# Altium PCB PCB1_1.pcbdoc (part 1 of 2)
Units mil, origin at the board's own origin, x right, y up, seen from the top; angles counter-clockwise.
Board outline 2868.46 x 4078.48 mil, 4 copper layers (Top Layer, Inner1, Inner2, Bottom Layer); 93 components, 179 nets, 649 pads, 461 vias.
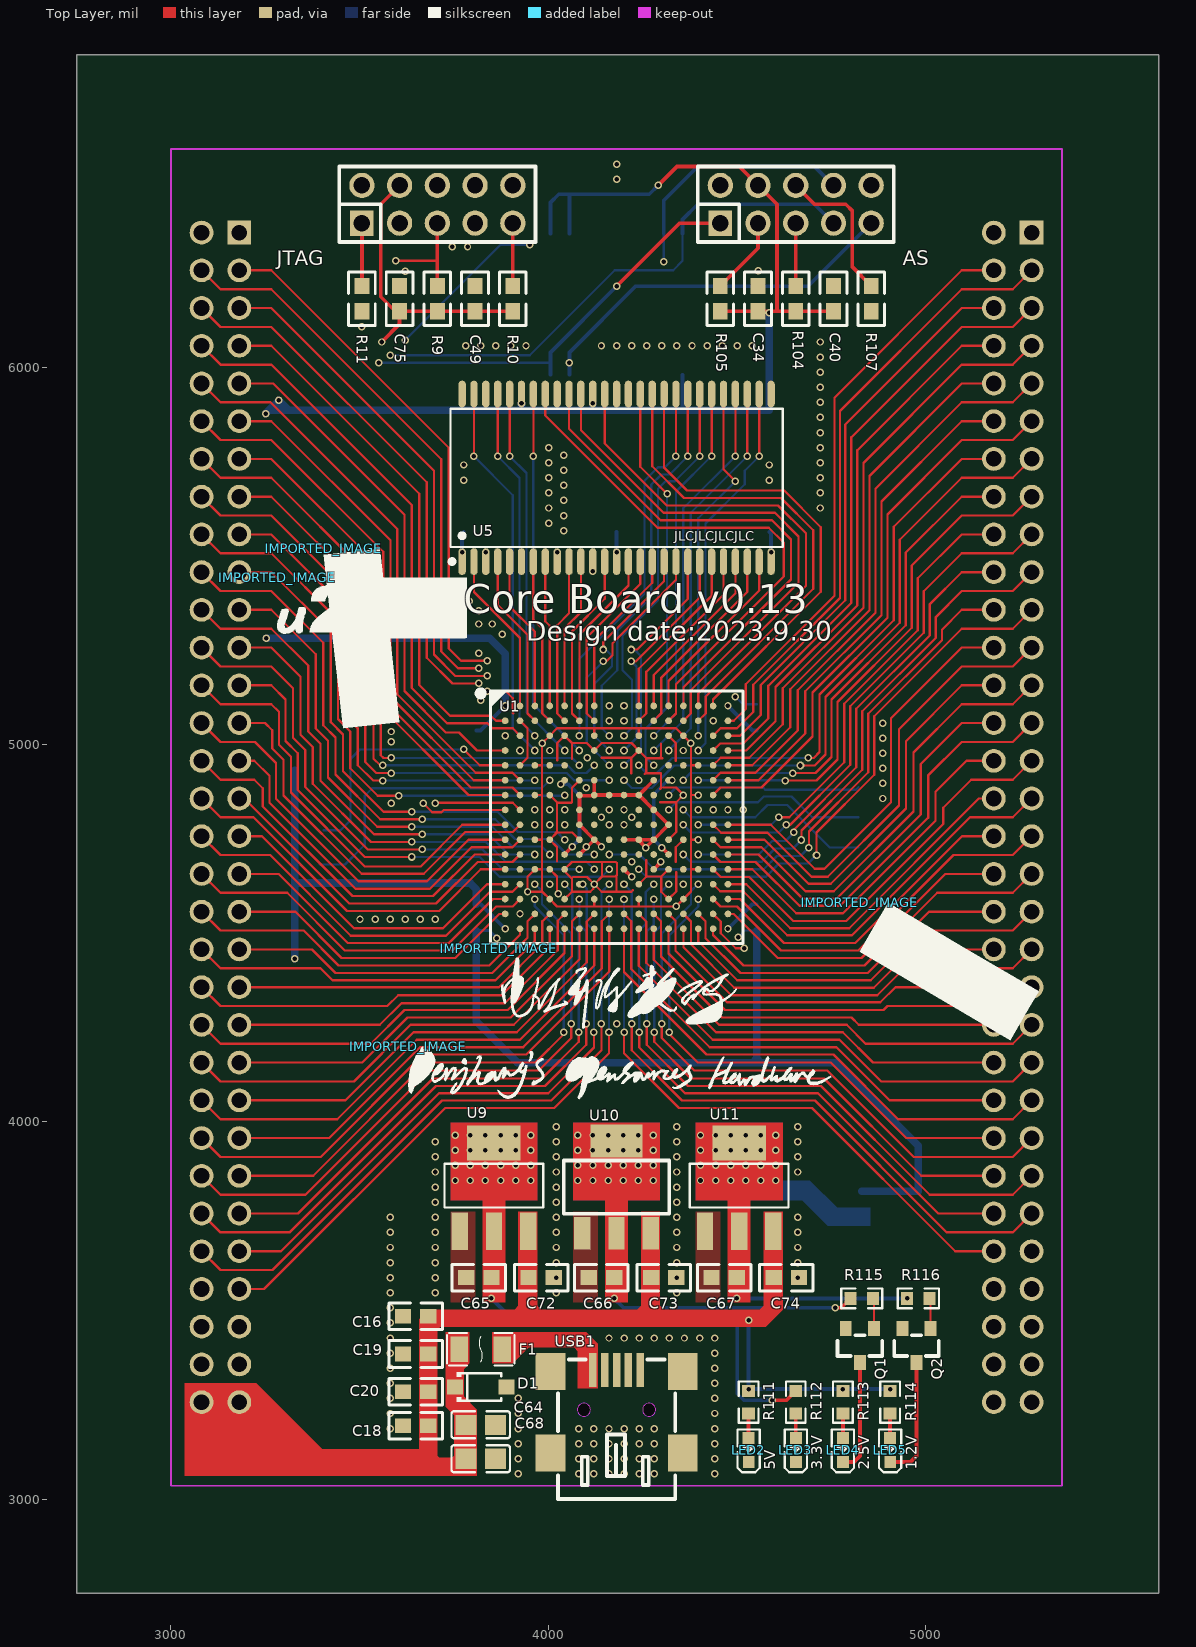
[diagram p0: Top Layer view]
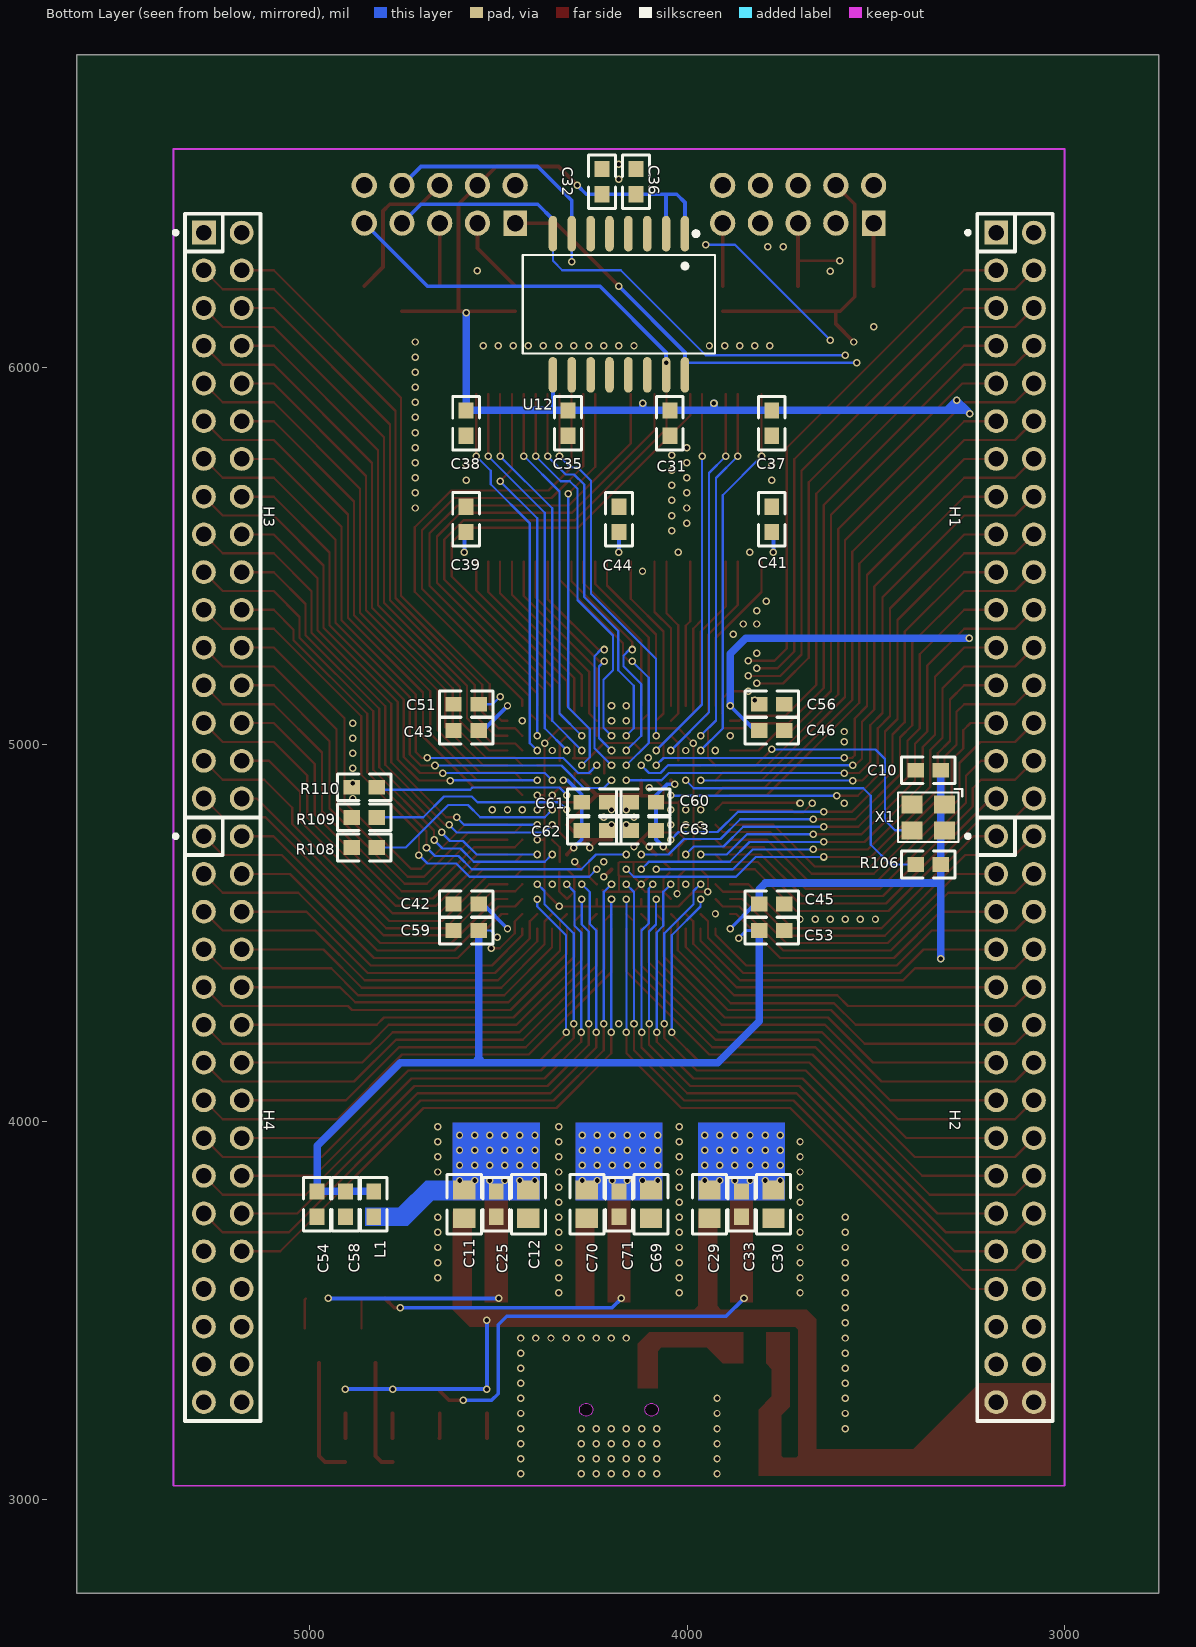
[diagram p1: Bottom Layer view, seen from below]
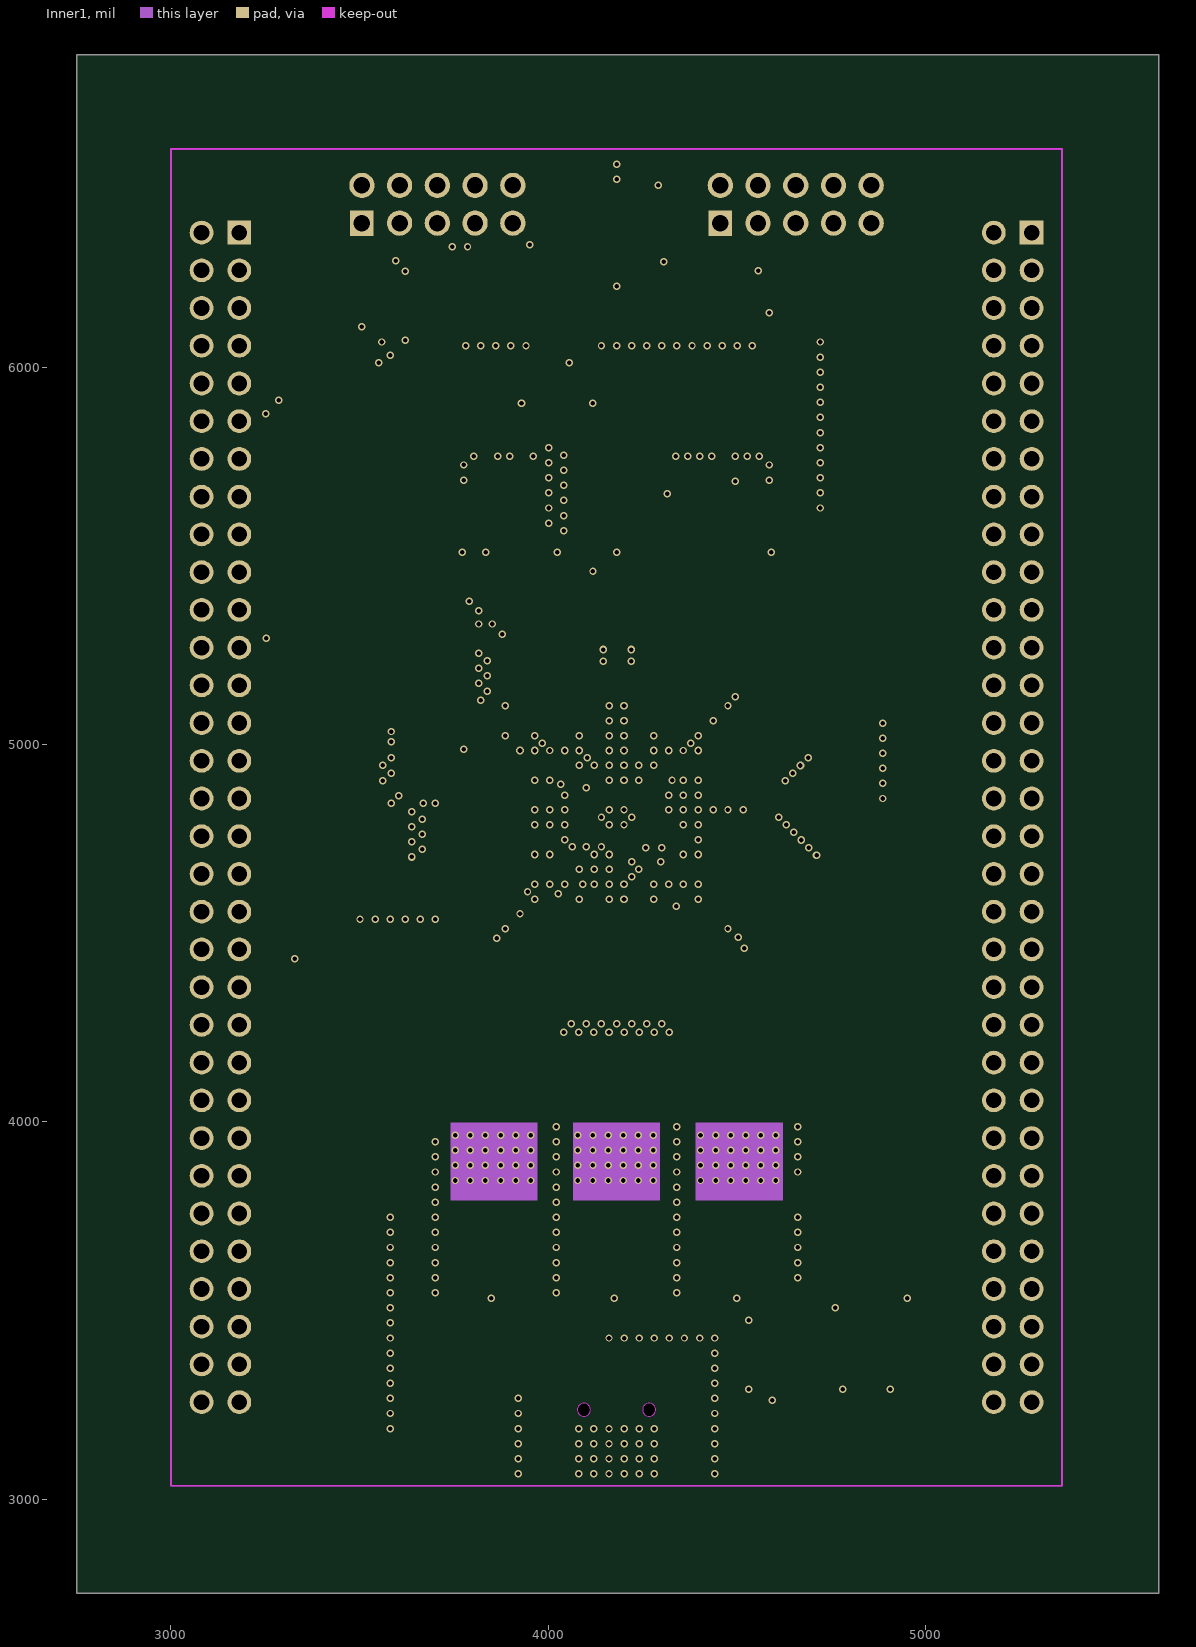
[diagram p2: Inner1]
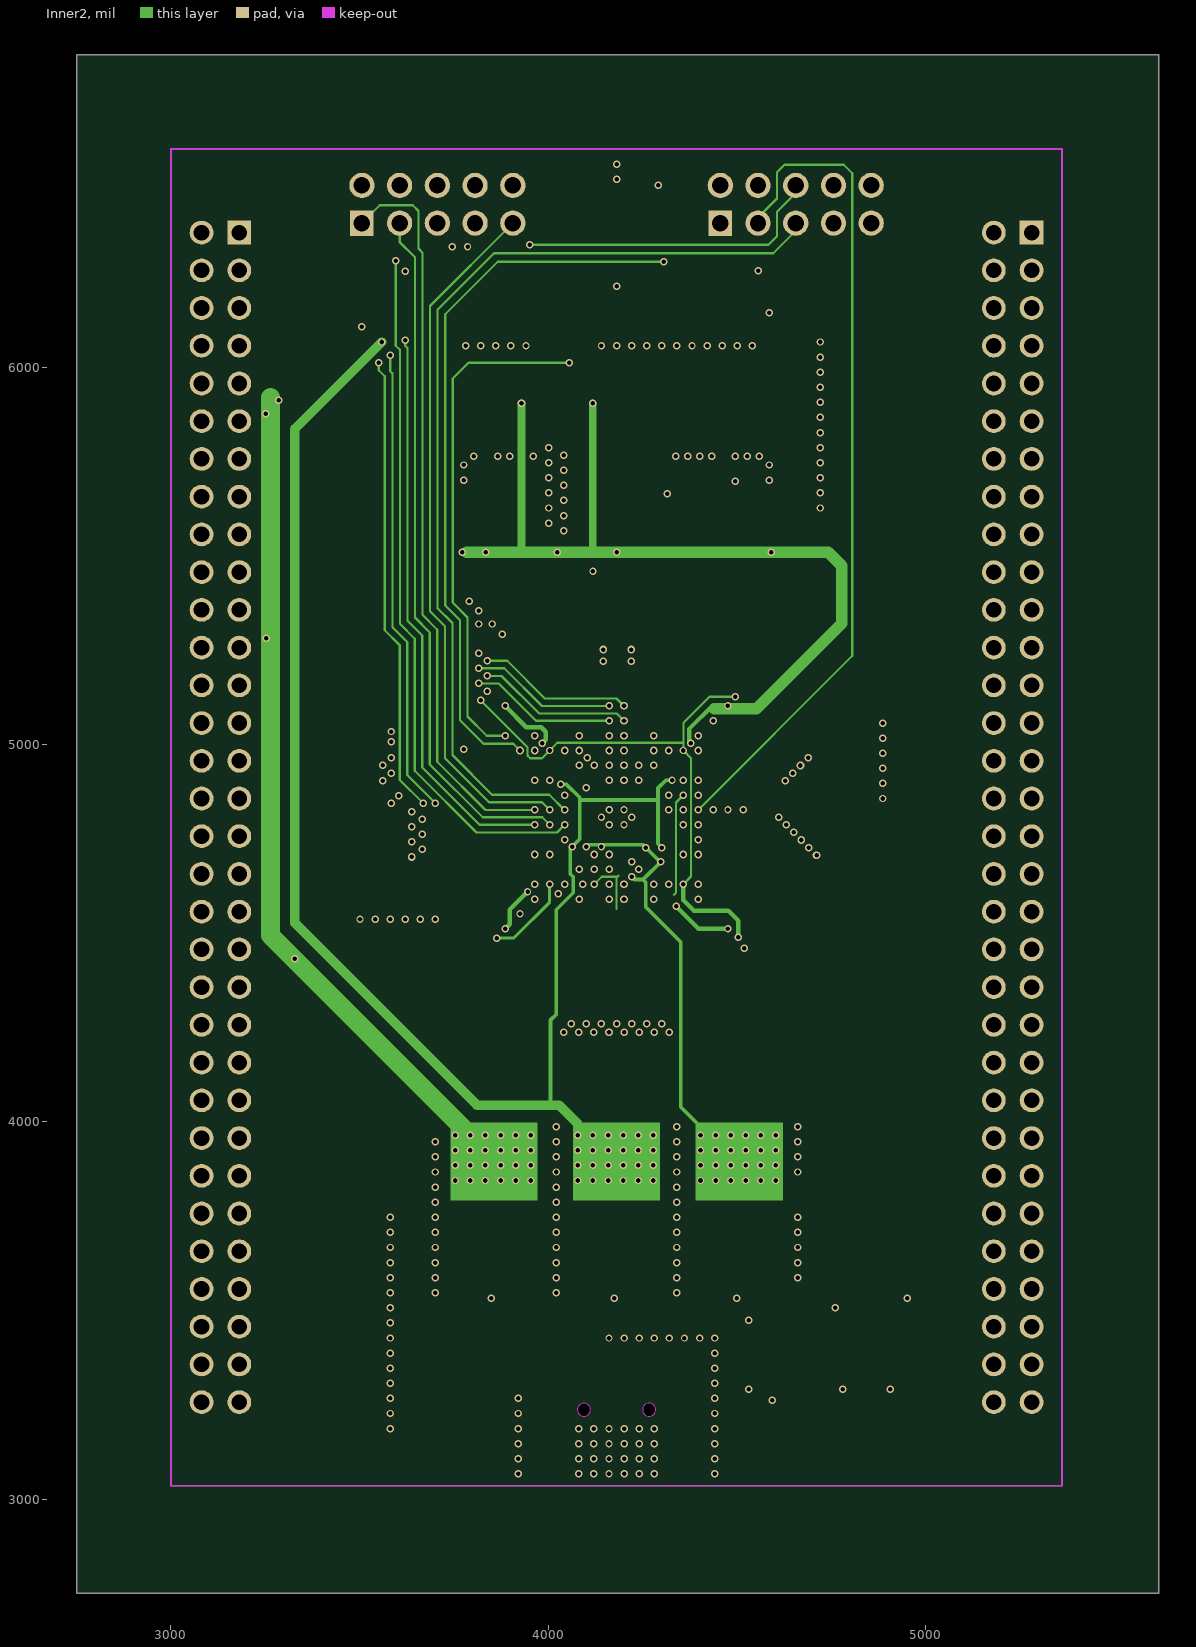
[diagram p3: Inner2]

## Layer stack, top to bottom
Top Layer: signal copper (thickness not stored)
Dielectric: dielectric 12.6, FR-4, Dk 4.8
Inner1: signal copper (thickness not stored)
Dielectric: dielectric 12.6, FR-4, Dk 4.8
Inner2: signal copper (thickness not stored)
Dielectric: dielectric 12.6, FR-4, Dk 4.8
Bottom Layer: signal copper (thickness not stored)

## Board outline
5618.46,2750 2750,2750 2750,6828.48 5618.46,6828.48

## Components (designator, comment, footprint, x,y, rotation, side; value= is the part's Value field where it differs from the comment)
AS "HDR-F_2.54_2x5" HDR-TH_10P-P2.54-V-F-R2-C5-S2.54 4656.1,6431.83 r0 top
C10 "100nF" 0603_3D 3361.1,4931.83 r0 bottom
C11 "47uF" 0805_3D 4591.1,3781.83 r90 bottom
C12 "47uF" 0805_3D 4421.1,3781.83 r90 bottom
C16 "4.7nF" 0603_3D 3648.6,3484.33 r0 top
C18 "10nF" 0603_3D 3648.6,3194.33 r0 top
C19 "470nF" 0603_3D 3648.6,3384.33 r0 top
C20 "470nF" 0603_3D 3648.6,3284.33 r0 top
C25 "100nF" 0603_3D 4506.1,3781.83 r90 bottom
C29 "47uF" 0805_3D 3941.1,3781.83 r90 bottom
C30 "47uF" 0805_3D 3771.1,3781.83 r90 bottom
C31 "100nF" 0603_3D 4046.1,5851.83 r90 bottom
C32 "100nF" 0603_3D 4226.1,6491.83 r270 bottom
C33 "100nF" 0603_3D 3856.1,3781.83 r90 bottom
C34 "100nF" 0603_3D 4556.1,6181.83 r270 top
C35 "100nF" 0603_3D 4316.1,5851.83 r90 bottom
C36 "100nF" 0603_3D 4136.1,6491.83 r270 bottom
C37 "100nF" 0603_3D 3776.1,5851.83 r90 bottom
C38 "100nF" 0603_3D 4586.1,5851.83 r90 bottom
C39 "10nF" 0603_3D 4586.1,5596.83 r270 bottom
C40 "10nF" 0603_3D 4756.1,6181.83 r270 top
C41 "10nF" 0603_3D 3776.1,5596.83 r270 bottom
C42 "10nF" 0603_3D 4586.1,4576.83 r180 bottom
C43 "10nF" 0603_3D 4586.1,5036.83 r180 bottom
C44 "10nF" 0603_3D 4181.1,5596.83 r270 bottom
C45 "10nF" 0603_3D 3776.1,4576.83 r0 bottom
C46 "10nF" 0603_3D 3776.1,5036.83 r0 bottom
C49 "100nF" 0603_3D 3806.1,6181.83 r270 top
C51 "10uF" 0603_3D 4586.1,5106.83 r180 bottom
C53 "100nF" 0603_3D 3776.1,4506.83 r0 bottom
C54 "100nF" 0603_3D 4981.1,3781.83 r90 bottom
C56 "10nF" 0603_3D 3776.1,5106.83 r0 bottom
C58 "10nF" 0603_3D 4906.1,3781.83 r90 bottom
C59 "10nF" 0603_3D 4586.1,4506.83 r180 bottom
C60 "10nF" 0603_3D 4116.1,4846.83 r180 bottom
C61 "10nF" 0603_3D 4246.1,4846.83 r0 bottom
C62 "10nF" 0603_3D 4246.1,4771.83 r0 bottom
C63 "10nF" 0603_3D 4116.1,4771.83 r180 bottom
C64 "CAP_0805" C0805 3821.1,3196.83 r180 top
C65 "CAP_0603" 0603_3D 3816.1,3586.83 r0 top
C66 "CAP_0603" 0603_3D 4141.1,3586.83 r0 top
C67 "CAP_0603" 0603_3D 4466.1,3586.83 r0 top
C68 "CAP_0805" C0805 3821.1,3106.83 r180 top
C69 "47uF" 0805_3D 4096.1,3781.83 r90 bottom
C70 "47uF" 0805_3D 4266.1,3781.83 r90 bottom
C71 "100nF" 0603_3D 4181.1,3781.83 r90 bottom
C72 "100nF" 0603_3D 3981.1,3586.83 r180 top
C73 "100nF" 0603_3D 4306.1,3586.83 r180 top
C74 "100nF" 0603_3D 4631.1,3586.83 r180 top
C75 "100nF" 0603_3D 3606.1,6181.83 r270 top
D1 "1N4148W_C81598" SOD-123F_L2.7-W1.6-LS3.8-RD 3821.1,3296.83 r0 top
F1 "FUSE" F1206 3821.1,3396.83 r180 top
H1 "X6521WV-2x16H-C30D60" HDR-TH_32P-2.54-V-M-R2-C16-S2.54 3131.1,5606.83 r270 bottom
H2 "X6521WV-2x16H-C30D60" hdr-th_32p-2.54-v-m-r2-c16-s2.54 3131.1,4006.83 r270 bottom
H3 "X6521WV-2x16H-C30D60" HDR-TH_32P-2.54-V-M-R2-C16-S2.54 5231.1,5606.83 r270 bottom
H4 "X6521WV-2x16H-C30D60" hdr-th_32p-2.54-v-m-r2-c16-s2.54 5231.1,4006.83 r270 bottom
IMPORTED_IMAGE "IMPORTED_IMAGE" IMPORTED_IMAGE 3629.49,4199.23 r0 top
IMPORTED_IMAGE "IMPORTED_IMAGE" IMPORTED_IMAGE 3868.64,4458.99 r0 top
IMPORTED_IMAGE "IMPORTED_IMAGE" IMPORTED_IMAGE 3404.99,5519.38 r0 top
IMPORTED_IMAGE "IMPORTED_IMAGE" IMPORTED_IMAGE 4825.16,4580.13 r0 top
IMPORTED_IMAGE "IMPORTED_IMAGE" IMPORTED_IMAGE 3281.1,5441.83 r0 top
JTAG "JTAG" HDR-TH_10P-P2.54-V-F-R2-C5-S2.54 3706.1,6431.83 r0 top
L1 "220R@100MHz" 0603_3D 4831.1,3781.83 r90 bottom
LED2 "5V" LED_0603 4531.1,3131.83 r90 top
LED3 "3.3V" LED_0603 4656.1,3131.83 r90 top
LED4 "2.5V" LED_0603 4781.1,3131.83 r90 top
LED5 "1.2V" LED_0603 4906.1,3131.83 r90 top
Q1 "S8050_SOT_NPN" S8050_SOT-23 4831.1,3406.83 r90 top
Q2 "S8050_SOT_NPN" S8050_SOT-23 4981.1,3406.83 r90 top
R9 "10k" 0603_3D 3706.1,6181.83 r270 top
R10 "10k" 0603_3D 3906.1,6181.83 r270 top
R11 "1k" 0603_3D 3506.1,6181.83 r270 top
R104 "10k" 0603_3D 4656.1,6181.83 r270 top
R105 "10k" 0603_3D 4456.1,6181.83 r270 top
R106 "10k" 0603_3D 3361.1,4681.83 r180 bottom
R107 "10k" 0603_3D 4856.1,6181.83 r270 top
R108 "10k" 0603_3D 4856.1,4726.83 r0 bottom
R109 "10k" 0603_3D 4856.1,4806.83 r0 bottom
R110 "10k" 0603_3D 4856.1,4886.83 r0 bottom
R111 "50M-1" R0603 4531.1,3256.83 r90 top
R112 "50M-1" R0603 4656.1,3256.83 r90 top
R113 "50M-1" R0603 4781.1,3256.83 r270 top
R114 "50M-1" R0603 4906.1,3256.83 r270 top
R115 "50M-1" R0603 4831.1,3531.83 r180 top
R116 "50M-1" R0603 4981.1,3531.83 r180 top
U1 "EP4CE22F17C8N" FBGA-256_L17.0-W17.0-R16-C16-P1.00-TL 4181.1,4806.83 r0 top
U5 "W9825G6KH-6" TSOP-54_L22.2-W10.2-P0.80-LS11.8-BL 4181.1,5706.83 r0 top
U9 "AMS1117-3.3_C6186" SOT-223-3_L6.5-W3.4-P2.30-LS7.0-BR 3856.1,3826.83 r270 top
U10 "AMS1117-2.5V" SOT-223_L6.7-W3.5-P2.30-BR 4181.1,3826.83 r270 top
U11 "LD1117AG-1.2V" SOT-223-3_L6.5-W3.4-P2.30-LS7.0-BR 4506.1,3826.83 r270 top
U12 "EPCS64SI16N" SOIC-16_L12.8-W7.5-P1.27-LS10.3-BL 4181.1,6166.83 r0 bottom
USB1 "5286050A01" MINI-USB-SMD_PAI_MINUSB_5P 4181.1,3231.83 r0 top
X1 "25MHz-OSC-SMD_4P-L3.2-W2.5-BL" OSC-SMD_4P-L3.2-W2.5-BL 3361.1,4806.83 r0 bottom

## Footprints (in the part's own frame and the unit in brackets; to place one, negate y for a bottom-side part, rotate by r counter-clockwise, add the part's x,y. Pads: shape width x height; smd on the part's side, far side on the other; paste and mask are expansions set on the pad)
0603_3D [mm]
  rect 1.1x1 smd: 1(-0.85,0) 2(0.85,0)
  silkscreen extent -1.8,-0.9 1.8,0.9
0805_3D [mm]
  rect 1.3x1.5 smd: 1(-0.95,0) 2(0.95,0)
  silkscreen extent -2,-1.15 2,1.15
C0805 [mm]
  rect 1.41x1.35 smd: 1(-1,0) 2(1,0)
  silkscreen extent -1.96,-0.9 1.96,0.9
F1206 [mm]
  rect 1.19x1.728 smd: 1(-1.445,0) 2(1.445,0)
  silkscreen extent -2.27,-1.09 2.27,1.09
FBGA-256_L17.0-W17.0-R16-C16-P1.00-TL [mm]
  round 0.45 smd: A1(-7.501,7.501) A2(-6.5,7.501) A3(-5.499,7.501) A4(-4.501,7.501) A5(-3.5,7.501) A6(-2.499,7.501) A7(-1.501,7.501) A8(-0.5,7.501) A9(0.5,7.501) A10(1.501,7.501) A11(2.499,7.501) A12(3.5,7.501) A13(4.501,7.501) A14(5.499,7.501) A15(6.5,7.501) A16(7.501,7.501) B1(-7.501,6.5) B2(-6.5,6.5) B3(-5.499,6.5) B4(-4.501,6.5) B5(-3.5,6.5) B6(-2.499,6.5) B7(-1.501,6.5) B8(-0.5,6.5) B9(0.5,6.5) B10(1.501,6.5) B11(2.499,6.5) B12(3.5,6.5) B13(4.501,6.5) B14(5.499,6.5) B15(6.5,6.5) B16(7.501,6.5) C1(-7.501,5.499) C2(-6.5,5.499) C3(-5.499,5.499) C4(-4.501,5.499) C5(-3.5,5.499) C6(-2.499,5.499) C7(-1.501,5.499) C8(-0.5,5.499) C9(0.5,5.499) C10(1.501,5.499) C11(2.499,5.499) C12(3.5,5.499) C13(4.501,5.499) C14(5.499,5.499) C15(6.5,5.499) C16(7.501,5.499) D1(-7.501,4.501) D2(-6.5,4.501) D3(-5.499,4.501) D4(-4.501,4.501) D5(-3.5,4.501) D6(-2.499,4.501) D7(-1.501,4.501) D8(-0.5,4.501) D9(0.5,4.501) D10(1.501,4.501) D11(2.499,4.501) D12(3.5,4.501) D13(4.501,4.501) D14(5.499,4.501) D15(6.5,4.501) D16(7.501,4.501) E1(-7.501,3.5) E2(-6.5,3.5) E3(-5.499,3.5) E4(-4.501,3.5) E5(-3.5,3.5) E6(-2.499,3.5) E7(-1.501,3.5) E8(-0.5,3.5) E9(0.5,3.5) E10(1.501,3.5) E11(2.499,3.5) E12(3.5,3.5) E13(4.501,3.5) E14(5.499,3.5) E15(6.5,3.5) E16(7.501,3.5) F1(-7.501,2.499) F2(-6.5,2.499) F3(-5.499,2.499) F4(-4.501,2.499) F5(-3.5,2.499) F6(-2.499,2.499) F7(-1.501,2.499) F8(-0.5,2.499) F9(0.5,2.499) F10(1.501,2.499) F11(2.499,2.499) F12(3.5,2.499) F13(4.501,2.499) F14(5.499,2.499) F15(6.5,2.499) F16(7.501,2.499) G1(-7.501,1.501) G2(-6.5,1.501) G3(-5.499,1.501) G4(-4.501,1.501) G5(-3.5,1.501) G6(-2.499,1.501) G7(-1.501,1.501) G8(-0.5,1.501) G9(0.5,1.501) G10(1.501,1.501) G11(2.499,1.501) G12(3.5,1.501) G13(4.501,1.501) G14(5.499,1.501) G15(6.5,1.501) G16(7.501,1.501) H1(-7.501,0.5) H2(-6.5,0.5) H3(-5.499,0.5) H4(-4.501,0.5) H5(-3.5,0.5) H6(-2.499,0.5) H7(-1.501,0.5) H8(-0.5,0.5) H9(0.5,0.5) H10(1.501,0.5) H11(2.499,0.5) H12(3.5,0.5) H13(4.501,0.5) H14(5.499,0.5) H15(6.5,0.5) H16(7.501,0.5) J1(-7.501,-0.5) J2(-6.5,-0.5) J3(-5.499,-0.5) J4(-4.501,-0.5) J5(-3.5,-0.5) J6(-2.499,-0.5) J7(-1.501,-0.5) J8(-0.5,-0.5) J9(0.5,-0.5) J10(1.501,-0.5) J11(2.499,-0.5) J12(3.5,-0.5) J13(4.501,-0.5) J14(5.499,-0.5) J15(6.5,-0.5) J16(7.501,-0.5) K1(-7.501,-1.501) K2(-6.5,-1.501) K3(-5.499,-1.501) K4(-4.501,-1.501) K5(-3.5,-1.501) K6(-2.499,-1.501) K7(-1.501,-1.501) K8(-0.5,-1.501) K9(0.5,-1.501) K10(1.501,-1.501) K11(2.499,-1.501) K12(3.5,-1.501) K13(4.501,-1.501) K14(5.499,-1.501) K15(6.5,-1.501) K16(7.501,-1.501) L1(-7.501,-2.499) L2(-6.5,-2.499) L3(-5.499,-2.499) L4(-4.501,-2.499) L5(-3.5,-2.499) L6(-2.499,-2.499) L7(-1.501,-2.499) L8(-0.5,-2.499) L9(0.5,-2.499) L10(1.501,-2.499) L11(2.499,-2.499) L12(3.5,-2.499) L13(4.501,-2.499) L14(5.499,-2.499) L15(6.5,-2.499) L16(7.501,-2.499) M1(-7.501,-3.5) M2(-6.5,-3.5) M3(-5.499,-3.5) M4(-4.501,-3.5) M5(-3.5,-3.5) M6(-2.499,-3.5) M7(-1.501,-3.5) M8(-0.5,-3.5) M9(0.5,-3.5) M10(1.501,-3.5) M11(2.499,-3.5) M12(3.5,-3.5) M13(4.501,-3.5) M14(5.499,-3.5) M15(6.5,-3.5) M16(7.501,-3.5) N1(-7.501,-4.501) N2(-6.5,-4.501) N3(-5.499,-4.501) N4(-4.501,-4.501) N5(-3.5,-4.501) N6(-2.499,-4.501) N7(-1.501,-4.501) N8(-0.5,-4.501) N9(0.5,-4.501) N10(1.501,-4.501) N11(2.499,-4.501) N12(3.5,-4.501) N13(4.501,-4.501) N14(5.499,-4.501) N15(6.5,-4.501) N16(7.501,-4.501) P1(-7.501,-5.499) P2(-6.5,-5.499) P3(-5.499,-5.499) P4(-4.501,-5.499) P5(-3.5,-5.499) P6(-2.499,-5.499) P7(-1.501,-5.499) P8(-0.5,-5.499) P9(0.5,-5.499) P10(1.501,-5.499) P11(2.499,-5.499) P12(3.5,-5.499) P13(4.501,-5.499) P14(5.499,-5.499) P15(6.5,-5.499) P16(7.501,-5.499) R1(-7.501,-6.5) R2(-6.5,-6.5) R3(-5.499,-6.5) R4(-4.501,-6.5) R5(-3.5,-6.5) R6(-2.499,-6.5) R7(-1.501,-6.5) R8(-0.5,-6.5) R9(0.5,-6.5) R10(1.501,-6.5) R11(2.499,-6.5) R12(3.5,-6.5) R13(4.501,-6.5) R14(5.499,-6.5) R15(6.5,-6.5) R16(7.501,-6.5) T1(-7.501,-7.501) T2(-6.5,-7.501) T3(-5.499,-7.501) T4(-4.501,-7.501) T5(-3.5,-7.501) T6(-2.499,-7.501) T7(-1.501,-7.501) T8(-0.5,-7.501) T9(0.5,-7.501) T10(1.501,-7.501) T11(2.499,-7.501) T12(3.5,-7.501) T13(4.501,-7.501) T14(5.499,-7.501) T15(6.5,-7.501) T16(7.501,-7.501)
  silkscreen extent -9.35,-8.5 8.5,8.55
HDR-TH_10P-P2.54-V-F-R2-C5-S2.54 [mm]
  rect 1.575x1.7 hole 1.1: 1(-5.08,-1.27)
  round 1.7 hole 1.1: 2(-5.08,1.27) 3(-2.54,-1.27) 4(-2.54,1.27) 5(0,-1.27) 6(0,1.27) 7(2.54,-1.27) 8(2.54,1.27) 9(5.08,-1.27) 10(5.08,1.27)
  silkscreen extent -6.6,-2.54 6.6,2.54
HDR-TH_32P-2.54-V-M-R2-C16-S2.54 [mm]
  rect 1.6x1.6 hole 1.05: 1(-19.05,-1.27)
  round 1.6 hole 1.05: 2(-19.05,1.27) 3(-16.51,-1.27) 4(-16.51,1.27) 5(-13.97,-1.27) 6(-13.97,1.27) 7(-11.43,-1.27) 8(-11.43,1.27) 9(-8.89,-1.27) 10(-8.89,1.27) 11(-6.35,-1.27) 12(-6.35,1.27) 13(-3.81,-1.27) 14(-3.81,1.27) 15(-1.27,-1.27) 16(-1.27,1.27) 17(1.27,-1.27) 18(1.27,1.27) 19(3.81,-1.27) 20(3.81,1.27) 21(6.35,-1.27) 22(6.35,1.27) 23(8.89,-1.27) 24(8.89,1.27) 25(11.43,-1.27) 26(11.43,1.27) 27(13.97,-1.27) 28(13.97,1.27) 29(16.51,-1.27) 30(16.51,1.27) 31(19.05,-1.27) 32(19.05,1.27)
  silkscreen extent -20.32,-3.3 20.32,2.54
hdr-th_32p-2.54-v-m-r2-c16-s2.54 [mm]
  round 1.6 hole 1.05: 1(-19.05,-1.27) 2(-19.05,1.27) 3(-16.51,-1.27) 4(-16.51,1.27) 5(-13.97,-1.27) 6(-13.97,1.27) 7(-11.43,-1.27) 8(-11.43,1.27) 9(-8.89,-1.27) 10(-8.89,1.27) 11(-6.35,-1.27) 12(-6.35,1.27) 13(-3.81,-1.27) 14(-3.81,1.27) 15(-1.27,-1.27) 16(-1.27,1.27) 17(1.27,-1.27) 18(1.27,1.27) 19(3.81,-1.27) 20(3.81,1.27) 21(6.35,-1.27) 22(6.35,1.27) 23(8.89,-1.27) 24(8.89,1.27) 25(11.43,-1.27) 26(11.43,1.27) 27(13.97,-1.27) 28(13.97,1.27) 29(16.51,-1.27) 30(16.51,1.27) 31(19.05,-1.27) 32(19.05,1.27)
  silkscreen extent -20.32,-3.3 20.32,2.54
IMPORTED_IMAGE [mil]
  silkscreen extent 0,-139 1120,0
LED_0603 [mil]
  rect 31.5x31.5 smd: 1(-33.5,-0.4) 2(29.5,-0.2)
  silkscreen extent -61,-30 53,30
MINI-USB-SMD_PAI_MINUSB_5P [mm]
  rect 0.5x2.3 smd: 1(-1.6,2.8) 2(-0.8,2.8) 3(0,2.8) 4(0.8,2.8) 5(1.6,2.8)
  rect 2x2.5 smd: 6(-4.45,2.7) 7(4.45,2.7) 8(-4.45,-2.8) 9(4.45,-2.8)
  Multi-Layer board cut-out: 2.65,0.124 2.587,0.346 2.423,0.508 2.2,0.567 1.977,0.508 1.813,0.346 1.75,0.124 1.75,0.124 1.813,-0.097 1.977,-0.259 2.2,-0.318 2.423,-0.259 2.587,-0.097 2.65,0.124
  Multi-Layer board cut-out: -1.75,0.124 -1.813,0.346 -1.977,0.508 -2.2,0.567 -2.423,0.508 -2.587,0.346 -2.65,0.124 -2.65,0.124 -2.587,-0.097 -2.423,-0.259 -2.2,-0.318 -1.977,-0.259 -1.813,-0.097 -1.75,0.124
  Multi-Layer keep-out region: 2.65,0.124 2.587,0.346 2.423,0.508 2.2,0.567 1.977,0.508 1.813,0.346 1.75,0.124 1.75,0.124 1.813,-0.097 1.977,-0.259 2.2,-0.318 2.423,-0.259 2.587,-0.097 2.65,0.124
  Multi-Layer keep-out region: -1.75,0.124 -1.813,0.346 -1.977,0.508 -2.2,0.567 -2.423,0.508 -2.587,0.346 -2.65,0.124 -2.65,0.124 -2.587,-0.097 -2.423,-0.259 -2.2,-0.318 -1.977,-0.259 -1.813,-0.097 -1.75,0.124
  silkscreen extent -3.95,-5.89 3.95,3.51
OSC-SMD_4P-L3.2-W2.5-BL [mm]
  rect 1.4x1.2 smd: 1(-1.1,-0.875) 2(1.1,-0.875) 3(1.1,0.875) 4(-1.1,0.875)
  silkscreen extent -2.29,-1.9 2.03,1.65
R0603 [mil]
  rect 31.75x34.02 smd: 1(-29.66,0) 2(29.66,0)
  silkscreen extent -55,-26 55,26
S8050_SOT-23 [mm]
  rect 1x0.8 smd: 1(1.15,-0.823) 2(1.15,1.077) 3(-1.15,0.127)
  silkscreen extent -0.7,-1.37 0.7,1.63
SOD-123F_L2.7-W1.6-LS3.8-RD [mm]
  rect 1.1x1 smd: 1(-1.735,0) 2(1.735,0)
  silkscreen extent -1.6,-1 1.38,1
SOIC-16_L12.8-W7.5-P1.27-LS10.3-BL [mil]
  oval 22.6x94.51 smd: 1(-175,-187.02) 2(-125,-187.02) 3(-75,-187.02) 4(-25,-187.02) 5(25,-187.02) 6(75,-187.02) 7(125,-187.02) 8(175,-187.02) 9(175,187.02) 10(125,187.02) 11(75,187.02) 12(25,187.02) 13(-25,187.02) 14(-75,187.02) 15(-125,187.02) 16(-175,187.02)
  silkscreen extent -255,-193 255,131
SOT-223-3_L6.5-W3.4-P2.30-LS7.0-BR [mm]
  rect 2.5x1.1 smd: 1(2.97,-2.3) 2(2.97,0) 3(2.97,2.3)
  rect 2.34x3.6 smd: 4(-2.97,0)
  silkscreen extent -1.57,-3.33 1.37,3.33
SOT-223_L6.7-W3.5-P2.30-BR [mm]
  rect 2.2x1.1 smd: 1(3.099,-2.3) 2(3.099,0) 3(3.099,2.3)
  rect 2.2x3.5 smd: 4(-3.099,0)
  silkscreen extent -1.8,-3.55 1.8,3.55
TSOP-54_L22.2-W10.2-P0.80-LS11.8-BL [mm]
  oval 0.5x1.8 smd: 1(-10.4,-5.642) 2(-9.6,-5.642) 3(-8.8,-5.642) 4(-8,-5.642) 5(-7.2,-5.642) 6(-6.4,-5.642) 7(-5.6,-5.642) 8(-4.8,-5.642) 9(-4,-5.642) 10(-3.2,-5.642) 11(-2.4,-5.642) 12(-1.6,-5.642) 13(-0.8,-5.642) 14(0,-5.642) 15(0.8,-5.642) 16(1.6,-5.642) 17(2.4,-5.642) 18(3.2,-5.642) 19(4,-5.642) 20(4.8,-5.642) 21(5.6,-5.642) 22(6.4,-5.642) 23(7.2,-5.642) 24(8,-5.642) 25(8.8,-5.642) 26(9.6,-5.642) 27(10.4,-5.642) 28(10.4,5.642) 29(9.6,5.642) 30(8.8,5.642) 31(8,5.642) 32(7.2,5.642) 33(6.4,5.642) 34(5.6,5.642) 35(4.8,5.642) 36(4,5.642) 37(3.2,5.642) 38(2.4,5.642) 39(1.6,5.642) 40(0.8,5.642) 41(0,5.642) 42(-0.8,5.642) 43(-1.6,5.642) 44(-2.4,5.642) 45(-3.2,5.642) 46(-4,5.642) 47(-4.8,5.642) 48(-5.6,5.642) 49(-6.4,5.642) 50(-7.2,5.642) 51(-8,5.642) 52(-8.8,5.642) 53(-9.6,5.642) 54(-10.4,5.642)
  silkscreen extent -11.23,-5.79 11.19,4.65

## Via types
v1: diameter 19.7, hole 12, Top Layer to Bottom Layer, 304 vias
v2: diameter 20, hole 12, Top Layer to Bottom Layer, 157 vias

## Nets (pads, with @x,y where several pads share a name; then routed paths per layer and width w, separated by ;. In a path a pad name is that pad's centre, name@x,y a point inside that pad or via, vN(x,y) a via of type N, cw(c..) or ccw(c..) an arc to the next point about the centre after c; other vN are vias at no path point)
5V: C16.2 C18.2 C19.2 C20.2 C64.2 C68.2 C72.2 C73.2 C74.2 D1.1 F1.2 H2.31 H2.32 R111.2 R113.1 R114.1 U9.3 U10.3 U11.3 | length 557.8
  Bottom Layer w10: v2(4531.1,3474.33) v2(4531.1,3291.49) v2(4781.1,3291.49) v2(4906.1,3291.49)
$1N37139: F1.1 USB1.1
$1N41626: R106.1 U1.F4 | length 778
  Bottom Layer w6: R106.1@3394.57,4681.83 3461.1,4681.83 3513.6,4734.33 3513.6,4864.33 3533.6,4884.33 3983,4884.33 v2(4003.9,4905.23)
$1N43489: R108.1 U1.H13 | length 532.6
  Bottom Layer w6: v2(4358.3,4826.53) 4378,4806.83 4548.6,4806.83 4581.1,4839.33 4633.6,4839.33 4746.1,4726.83 R108.1@4822.64,4726.83
$1N43533: R109.1 U1.H12 | length 541.1
  Bottom Layer w6: v2(4318.9,4826.53) 4339.2,4846.83 4556.1,4846.83 4571.1,4861.83 4644.73,4861.83 4699.73,4806.83 R109.1@4822.64,4806.83
$1N43577: R110.1 U1.G12 | length 517.4
  Bottom Layer w6: v2(4318.9,4865.93) 4338.8,4885.83 4569.1,4885.83 4575.1,4879.83 4815.64,4879.83 R110.1@4822.64,4886.83
$1N43963: LED2.2 R111.1 | length 65.9
  Top Layer w10: R111.1@4531.1,3227.17 4531.1,3161.53 LED2.2@4531.3,3161.33
$1N43965: LED3.2 R112.1 | length 65.9
  Top Layer w10: R112.1@4656.1,3227.17 4656.1,3161.53 LED3.2@4656.3,3161.33
$1N44437: Q1.1 R115.1 | length 80.9
  Top Layer w6: R115.1@4860.76,3531.83 4863.5,3529.09 Q1.1@4863.5,3452.11
$1N44441: Q2.1 R116.1 | length 80.9
  Top Layer w6: R116.1@5010.76,3531.83 5013.5,3529.09 Q2.1@5013.5,3452.11
$1N44679: LED5.2 R114.2 | length 65.9
  Top Layer w10: R114.2@4906.1,3227.17 4906.1,3161.53 LED5.2@4906.3,3161.33
$1N44681: LED4.2 R113.2 | length 65.9
  Top Layer w10: R113.2@4781.1,3227.17 4781.3,3226.97 LED4.2@4781.3,3161.33
$1N44686: LED4.1 Q1.3 | length 298.4
  Top Layer w10: LED4.1@4781.5,3098.33 4810.1,3098.33 4826.1,3114.33 Q1.3@4826.1,3361.55
$1N44690: LED5.1 Q2.3 | length 323.4
  Top Layer w10: LED5.1@4906.5,3098.33 4960.1,3098.33 4976.1,3114.33 Q2.3@4976.1,3361.55
ASDI: AS.9 U1.C1 U12.15 | length 2360.8
  Inner2 w6: v2(3885.8,5023.33) 3837.1,5023.33 3786.1,5074.33 3786.1,5336.83 3746.8,5376.13 3746.8,5970.03 3788.6,6011.83 v2(4056.1,6011.83)
  Bottom Layer w10: U12.15@4056.1,5979.81 v2(4056.1,6011.83) 4056.1,6039.33 4231.1,6214.33 4688.6,6214.33 AS.9@4856.1,6381.83
AUD_I2S: H3.9 U1.F15 | length 1534.5
  Top Layer w6: U1.F15@4437,4905.23 4456.6,4924.83 4549.12,4924.83 4661.5,5037.21 4661.5,5143.74 4867.13,5349.38 4867.13,5677.86 5096.1,5906.83 5231.1,5906.83 H3.9@5281.1,5956.83
AUD_SCK: H3.17 U1.J13 | length 1413.7
  Top Layer w6: v2(4631.1,4786.83) 4641.1,4786.83 4800.6,4946.33 4800.6,5101.33 4995.65,5296.38 4995.65,5406.38 5096.1,5506.83 5231.1,5506.83 H3.17@5281.1,5556.83
  Bottom Layer w6: v2(4358.3,4787.13) 4378.6,4766.83 4611.1,4766.83 v2(4631.1,4786.83)
AUD_WS: H3.11 U1.G15 | length 1483.1
  Top Layer w6: U1.G15@4437,4865.93 4456.9,4885.83 4565.28,4885.83 4700.5,5021.06 4700.5,5137.74 4898.95,5336.19 4898.95,5609.68 5096.1,5806.83 5231.1,5806.83 H3.11@5281.1,5856.83
BTN_N_I_1: H2.18 U1.T8 | length 1417.9
  Top Layer w6: H2.18@3081.1,3956.83 3131.1,3906.83 3396.82,3906.83 3668.12,4178.13 3941.44,4178.13 4161.4,4398.09 U1.T8@4161.4,4511.53
BTN_N_I_2: H2.17 U1.R8 | length 1299.9
  Top Layer w6: H2.17@3181.1,3956.83 3419.53,3956.83 3660.13,4197.43 3933.45,4197.43 4142.1,4406.09 4142.1,4531.63 U1.R8@4161.4,4550.93
CLOCK_50_I: U1.E1 X1.3 | length 682.9
  Top Layer w6: v2(3776.1,4986.83) 3818.3,4944.63 U1.E1@3885.8,4944.63
  Bottom Layer w6: X1.3@3404.41,4772.38 3449.15,4772.38 3476.1,4799.33 3476.1,4961.83 3501.1,4986.83 v2(3776.1,4986.83)
CONF_DONE: AS.3 R105.1 U1.H14 | length 2438.3
  Top Layer w10: R105.1@4456.1,6215.29 4556.1,6315.29 AS.3@4556.1,6381.83
  Inner2 w6: v2(4397.6,4826.53) 4806.1,5235.03 4806.1,6514.33 4783.6,6536.83 4626.1,6536.83 4606.1,6516.83 4606.1,6446.83 4556.1,6396.83 AS.3@4556.1,6381.83
DAC_L_O: H3.19 U1.L13 | length 1386.3
  Top Layer w6: v2(4671.1,4746.83) 4671.1,4771.83 4832.42,4933.15 4832.42,5088.15 5027.47,5283.2 5027.47,5338.2 5096.1,5406.83 5231.1,5406.83 H3.19@5281.1,5456.83
  Bottom Layer w6: v2(4358.3,4708.43) 4377.4,4689.33 4566.1,4689.33 4601.1,4724.33 4648.6,4724.33 v2(4671.1,4746.83)
DAC_R_O: H3.13 U1.F9 | length 1668.1
  Top Layer w6: v2(4668.6,4944.33) 4706.1,4944.33 4735.19,4973.42 4735.19,5125.92 4932.01,5322.74 4932.01,5542.74 5096.1,5706.83 5231.1,5706.83 H3.13@5281.1,5756.83
  Bottom Layer w6: v2(4200.8,4905.23) 4221.2,4884.83 4274.1,4884.83 4333.6,4944.33 v2(4668.6,4944.33)
DATA: AS.7 U1.H2 U12.8 | length 2895.8
  Top Layer w6: v2(3701.1,4844.33) 3702.6,4845.83 3905.9,4845.83 U1.H2@3925.2,4826.53
  Inner2 w6: v2(3581.1,6031.83) 3581.1,5989.53 3587.1,5983.53 3587.1,5310.83 3626.1,5271.83 3626.1,4919.33 v2(3701.1,4844.33)
  Bottom Layer w6: v2(3581.1,6031.83) 3951.1,6031.83 4176.1,6256.83 4331.1,6256.83 4356.1,6281.83 U12.8@4356.1,6353.85
  Bottom Layer w10: U12.8@4356.1,6353.85 4356.1,6391.83 4396.1,6431.83 4706.1,6431.83 AS.7@4756.1,6381.83
DCLK: AS.1 U1.H1 U12.16 | length 2552.7
  Top Layer w6: v2(3668.6,4844.33) 3692.4,4820.53 3717.3,4820.53 3723.3,4826.53 U1.H1@3885.8,4826.53
  Top Layer w10: v2(4181.1,6214.33) 4348.6,6381.83 AS.1@4456.1,6381.83
  Inner2 w6: v2(3551.1,6011.83) 3551.1,5991.83 3566.8,5976.13 3566.8,5302.85 3606.1,5263.55 3606.1,4906.83 v2(3668.6,4844.33)
  Bottom Layer w6: v2(3551.1,6011.83) 4004.69,6011.83 U12.16@4006.1,6010.42
  Bottom Layer w10: U12.16@4006.1,5979.81 4006.1,6010.42 4006.1,6039.33 v2(4181.1,6214.33)
DGND: AS.2 AS.10 C10.2 C11.1 C12.1 C16.1 C18.1 C19.1 C20.1 C25.1 C29.1 C30.1 C31.1 C32.1 C33.1 C34.1 C35.1 C36.1 C37.1 C38.1 C39.1 C40.1 C41.1 C42.1 C43.1 C44.1 C45.1 C46.1 C49.1 C51.1 C53.1 C54.1 C56.1 C58.1 C59.1 C60.1 C61.1 C62.1 C63.1 C64.1 C65.1 C66.1 C67.1 C68.1 C69.1 C70.1 C71.1 C72.1 C73.1 C74.1 C75.1 D1.2 H1.1 H1.2 H2.26 H2.27 H2.28 H3.1 H3.2 H4.23 H4.25 H4.26 H4.27 H4.28 H4.29 H4.30 H4.31 H4.32 JTAG.2 JTAG.10 LED2.1 LED3.1 Q1.2 Q2.2 R11.2 R107.2 R108.2 R109.2 R110.2 U1.B2 U1.B15 U1.C5 U1.C12 U1.D7 U1.D10 U1.E2 U1.E4 U1.E5 U1.E12 U1.E13 U1.F6 U1.F10 U1.G4 U1.G11 U1.G13 U1.H7 U1.H8 U1.H9 U1.H10 U1.H15 U1.H16 U1.J7 U1.J8 U1.J9 U1.J10 U1.J11 U1.K4 U1.K6 U1.K8 U1.K12 U1.K13 U1.L9 U1.L10 U1.L11 U1.M4 U1.M5 U1.M12 U1.M13 U1.N7 U1.N10 U1.P5 U1.P12 U1.R2 U1.R15 U5.6 U5.12 U5.28 U5.41 U5.46 U5.52 U5.54 U9.1 U10.1 U11.1 U12.10 USB1.5 USB1.6 USB1.7 USB1.8 USB1.9 X1.2 | length 3302.8
  Top Layer w6: v1(3838.1,5140.83) 3888.1,5140.83 3906.1,5122.83 3906.1,5083.83 3907.1,5082.83 ; U1.E2@3925.2,4944.63 3945.1,4964.53 3945.1,5042.83 U1.B2@3925.2,5062.73 ; U1.M4@4003.9,4669.03 4023.1,4649.83 4023.1,4613.83 ; U1.G4@4003.9,4865.93 4023.1,4846.73 ; 4020.1,4766.83 4023,4766.83 ; 4023.1,4689.83 4023.1,4728.53 U1.K4@4003.9,4747.73 4023,4766.83 ; 4024.1,4957.83 4024.1,5004.13 U1.C5@4043.3,5023.33 4062.8,5003.83 ; U1.P5@4043.3,4590.33 4062.8,4609.83 4111.1,4609.83 4119.1,4617.83 ; U1.M5@4043.3,4669.03 4063.1,4688.83 4142.31,4688.83 ; 4047.1,4659.83 4063.1,4643.83 4063.1,4611.83 ; 4063.1,4961.83 4063.1,5003.53 4062.8,5003.83 ; 4066.1,4648.83 4102.8,4648.83 v1(4122,4629.63) ; U1.K6@4082.7,4747.73 4063.6,4766.83 4023,4766.83 ; U1.F6@4082.7,4905.23 4063.1,4885.63 4063.1,4847.83 4061.1,4845.83 4024,4845.83 4023.1,4846.73 ; 4142.1,4964.83 4221,4964.83 ; 4220.1,4922.83 4220.1,4963.93 4221,4964.83 ; 4224.1,4613.83 4220.1,4609.83 4180.97,4609.83 ; U1.N10@4240.2,4629.63 4260.1,4649.53 ; 4256.1,4921.83 4258.1,4923.83 4299.1,4923.83 4299.1,4884.83 4297.1,4882.83 ; 4260.1,4692.83 4260.1,4649.53 ; 4260.1,4925.83 4260.1,4964.13 ; 4297.1,4846.73 4339.1,4846.73 ; 4297.1,4964.83 4299.1,4966.83 4299.1,5001.83 ; 4303.1,4963.83 4260.4,4963.83 4260.1,4964.13 ; 4304.1,4885.83 4338.4,4885.83 v1(4358.3,4865.93) 4339.1,4846.73 ; U1.M12@4318.9,4669.03 4299.7,4649.83 ; U1.K12@4318.9,4747.73 4339.1,4767.93 4339.1,4846.73 ; U1.C12@4318.9,5023.33 4338.1,5004.13 4338.1,4956.83 ; 4338.1,4688.83 4338.1,4727.53 U1.K13@4358.3,4747.73 ; 4339.1,4661.83 4339.1,4610.53 U1.P12@4318.9,4590.33 4299.7,4609.53 4299.7,4649.83 ; U1.R15@4437,4550.93 4457.1,4530.83 4457.1,4499.83 4497.1,4459.83 v1(4519.1,4459.83) ; 4023,4766.83 4023.1,4766.93 4023.1,4846.73 ; 4062.8,5003.83 4102.2,5003.83 U1.D7@4122,4984.03 4141.8,5003.83 4220.4,5003.83 U1.D10@4240.2,4984.03 ; v1(4122,4629.63) 4141.8,4609.83 4180.97,4609.83 ; v1(4122,4629.63) 4142.2,4649.83 ; 4142.2,4649.83 4142.31,4649.94 4142.31,4688.83 ; 4142.2,4649.83 4178.1,4649.83 4180.97,4652.7 ; 4142.31,4688.83 4179.1,4688.83 4182.1,4685.83 4182.1,4653.83 4180.97,4652.7 ; 4180.97,4609.83 4180.97,4652.7 ; 4221,4964.83 U1.D10@4240.2,4984.03 ; U1.D10@4240.2,4984.03 4260.1,4964.13 ; 4260.1,4649.53 4260.4,4649.83 4299.7,4649.83
  Inner2 w6: v1(4122,4629.63) 4141.7,4649.33 4181.1,4649.33 ; 4181.1,4564.33 4181.1,4646.83 4186.1,4651.83 ; 4333.6,4601.83 4338.6,4606.83 4338.6,4846.23 v1(4358.3,4865.93)
  other v1: 3921.1,3066.83 4081.1,3066.83 4121.1,3066.83 4161.1,3066.83 4201.1,3066.83 4241.1,3066.83 4281.1,3066.83 4441.1,3066.83 3921.1,3106.83 4081.1,3106.83 4121.1,3106.83 4161.1,3106.83 4201.1,3106.83 4241.1,3106.83 4281.1,3106.83 4441.1,3106.83 3921.1,3146.83 4081.1,3146.83 4121.1,3146.83 4161.1,3146.83 4201.1,3146.83 4241.1,3146.83 4281.1,3146.83 4441.1,3146.83 3581.1,3186.83 3921.1,3186.83 4081.1,3186.83 4121.1,3186.83 4161.1,3186.83 4201.1,3186.83 4241.1,3186.83 4281.1,3186.83 4441.1,3186.83 3581.1,3226.83 3921.1,3226.83 4441.1,3226.83 3581.1,3266.83 3921.1,3266.83 4441.1,3266.83 3581.1,3306.83 4441.1,3306.83 3581.1,3346.83 4441.1,3346.83 3581.1,3386.83 4441.1,3386.83 3581.1,3426.83 4161.1,3426.83 4201.1,3426.83 4241.1,3426.83 4281.1,3426.83 4321.1,3426.83 4361.1,3426.83 4401.1,3426.83 4441.1,3426.83 3581.1,3466.83 3581.1,3506.83 3581.1,3546.83 3701.1,3546.83 4021.1,3546.83 4341.1,3546.83 3581.1,3586.83 3701.1,3586.83 4021.1,3586.83 4341.1,3586.83 4661.1,3586.83 3581.1,3626.83 3701.1,3626.83 4021.1,3626.83 4341.1,3626.83 4661.1,3626.83 3581.1,3666.83 3701.1,3666.83 4021.1,3666.83 4341.1,3666.83 4661.1,3666.83 3581.1,3706.83 3701.1,3706.83 4021.1,3706.83 4341.1,3706.83 4661.1,3706.83 3581.1,3746.83 3701.1,3746.83 4021.1,3746.83 4341.1,3746.83 4661.1,3746.83 3701.1,3786.83 4021.1,3786.83 4341.1,3786.83 3701.1,3826.83 4021.1,3826.83 4341.1,3826.83 3701.1,3866.83 4021.1,3866.83 4341.1,3866.83 4661.1,3866.83 3701.1,3906.83 4021.1,3906.83 4341.1,3906.83 4661.1,3906.83 3701.1,3946.83 4021.1,3946.83 4341.1,3946.83 4661.1,3946.83 4021.1,3986.83 4341.1,3986.83 4661.1,3986.83 3501.1,4536.83 3541.1,4536.83 3581.1,4536.83 3621.1,4536.83 3661.1,4536.83 3701.1,4536.83 3925.2,4550.93 4027.1,4603.83 4221.1,4689.33 4161.4,4787.13 4200.8,4787.13 4141.1,4806.83 4221.1,4806.83 4161.4,4826.53 4200.8,4826.53 4437,4826.53 4476.4,4826.53 4516.4,4826.53 3583.6,4844.33 4886.1,4856.83 4101.1,4885.83 4886.1,4896.83 4240.2,4905.23 4886.1,4936.83 4103.1,4964.83 4886.1,4976.83 3583.6,5006.83 4886.1,5016.83 3583.6,5034.33 4886.1,5056.83 4437,5062.73 3816.1,5241.83 3878.6,5291.83 3816.1,5319.33 3851.1,5319.33 3816.1,5354.33 3791.1,5379.33 4118.6,5459.33 4041.1,5566.83 4001.1,5586.83 4041.1,5606.83 4001.1,5626.83 4721.1,5626.83 4041.1,5646.83 4001.1,5666.83 4721.1,5666.83 4041.1,5686.83 3776.1,5700.87 4586.1,5700.87 4001.1,5706.83 4721.1,5706.83 4041.1,5726.83 3776.1,5740.87 4586.1,5740.87 4001.1,5746.83 4721.1,5746.83 4041.1,5766.83 4001.1,5786.83 4721.1,5786.83 4721.1,5826.83 4721.1,5866.83 4721.1,5906.83 4721.1,5946.83 4721.1,5986.83 4721.1,6026.83 3781.1,6056.83 3821.1,6056.83 3861.1,6056.83 3901.1,6056.83 3941.1,6056.83 4141.1,6056.83 4181.1,6056.83 4221.1,6056.83 4261.1,6056.83 4301.1,6056.83 4341.1,6056.83 4381.1,6056.83 4421.1,6056.83 4461.1,6056.83 4501.1,6056.83 4541.1,6056.83 4721.1,6066.83 3506.1,6106.83 3621.1,6253.83 4556.1,6255.83 3746.1,6318.76 3786.1,6318.76 4181.1,6498.48 4181.1,6538.48
  other v2: 4181.1,4259.33
DIP_I_1: H3.10 U1.E16 | length 1391.7
  Top Layer w6: U1.E16@4476.4,4944.63 4540.92,4944.63 4641.7,5045.41 4641.7,5146.44 4851.22,5355.97 4851.22,5711.95 5096.1,5956.83 H3.10@5181.1,5956.83
DIP_I_2: H3.7 U1.E15 | length 1585.1
  Top Layer w6: U1.E15@4437,4944.63 4457.2,4964.83 4532.55,4964.83 4621.5,5053.78 4621.5,5148.74 4835.31,5362.56 4835.31,5746.04 5096.1,6006.83 5231.1,6006.83 H3.7@5281.1,6056.83
DIP_I_3: H1.5 U1.B9 | length 1758.5
  Top Layer w6: H1.5@3181.1,6156.83 3266.1,6156.83 3697.21,5725.72 3697.21,5238.22 3753.6,5181.83 v2(3838.6,5181.83)
  Inner2 w6: v2(3838.6,5181.83) 3876.1,5181.83 3976.1,5081.83 4181.7,5081.83 v2(4200.8,5062.73)
DIP_I_4: H1.3 U1.A9 | length 1809.9
  Top Layer w6: H1.3@3181.1,6256.83 3266.1,6256.83 3736.1,5786.83 3736.1,5254.33 3768.6,5221.83 v2(3838.6,5221.83)
  Inner2 w6: v2(3838.6,5221.83) 3891.1,5221.83 3991.1,5121.83 4181.1,5121.83 v2(4200.8,5102.13)
DIP_I_5: H1.4 U1.A8 | length 1857.3
  Top Layer w6: H1.4@3081.1,6256.83 3131.1,6206.83 3266.1,6206.83 3716.66,5756.28 3716.66,5246.28 3761.1,5201.83 v2(3816.1,5201.83)
  Inner2 w6: v2(3816.1,5201.83) 3883.6,5201.83 3983.3,5102.13 v2(4161.4,5102.13)
DIP_I_6: H1.6 U1.B8 | length 1805.9
  Top Layer w6: H1.6@3081.1,6156.83 3131.1,6106.83 3266.1,6106.83 3677.77,5695.17 3677.77,5230.17 3746.1,5161.83 v2(3816.1,5161.83)
  Inner2 w6: v2(3816.1,5161.83) 3868.6,5161.83 3967.7,5062.73 v2(4161.4,5062.73)
DIP_I_7: H3.29 U1.M15 | length 1101.9
  Top Layer w6: U1.M15@4437,4669.03 4457.2,4648.83 4532.55,4648.83 4649.15,4532.23 4789.59,4532.23 5046.9,4789.54 5046.9,4832.63 5121.1,4906.83 5231.1,4906.83 H3.29@5281.1,4956.83
DIP_I_8: H3.30 U1.M16 | length 965.6
  Top Layer w6: U1.M16@4476.4,4669.03 4540.92,4669.03 4657.52,4552.43 4781.22,4552.43 5026.7,4797.91 5026.7,4874.93 5108.6,4956.83 H3.30@5181.1,4956.83
EAR_I: H4.17 U1.N14 | length 1579.7
  Top Layer w6: v2(4301.1,4259.33) 4301.1,4221.83 4387.32,4135.62 4739.82,4135.62 4968.6,3906.83 5231.1,3906.83 H4.17@5281.1,3956.83
  Bottom Layer w6: v2(4301.1,4259.33) 4301.1,4499.33 4378.6,4576.83 4378.6,4611.83 4396.4,4629.63 v2(4397.6,4629.63)
ESP_RX_O: H4.19 U1.P11 | length 1599
  Top Layer w6: v2(4261.1,4259.33) 4261.1,4204.33 4370.47,4094.96 4722.97,4094.96 5011.1,3806.83 5231.1,3806.83 H4.19@5281.1,3856.83
  Bottom Layer w6: v2(4261.1,4259.33) 4261.1,4504.33 4279.5,4522.73 v2(4279.5,4590.33)
ESP_TX_I: H4.15 U1.T9 | length 1377.1
  Top Layer w6: U1.T9@4200.8,4511.53 4200.8,4397.13 4419.8,4178.13 4755.94,4178.13 4927.24,4006.83 5231.1,4006.83 H4.15@5281.1,4056.83
HDMI_DE: H3.5 U1.D15 | length 1637.3
  Top Layer w6: U1.D15@4437,4984.03 4455.8,5002.83 4516.81,5002.83 4583.5,5069.52 4583.5,5155.74 4803.49,5375.74 4803.49,5814.22 5096.1,6106.83 5231.1,6106.83 H3.5@5281.1,6156.83
HDMI_INT: H1.32 U1.M1 | length 973.9
  Top Layer w6: H1.32@3081.1,4856.83 3131.1,4806.83 3218.6,4806.83 3466.7,4558.73 3710.98,4558.73 3821.28,4669.03 U1.M1@3885.8,4669.03
HDMI_PCLK: H3.3 U1.C15 | length 1687.8
  Top Layer w6: U1.C15@4437,5023.33 4456.5,5042.83 4500.25,5042.83 4543.5,5086.09 4543.5,5158.24 4773.44,5388.18 4773.44,5884.17 5096.1,6206.83 5231.1,6206.83 H3.3@5281.1,6256.83
HDMI_RST: H3.26 U1.K16 | length 1075.1
  Top Layer w6: U1.K16@4476.4,4747.73 4573.52,4747.73 4690.12,4631.13 4748.62,4631.13 4948,4830.51 4948,5008.73 5096.1,5156.83 H3.26@5181.1,5156.83
HDMI_SCL: H3.18 U1.J14 | length 1273.7
  Top Layer w6: v2(4611.1,4806.83) 4638.6,4806.83 4784.69,4952.92 4784.69,5107.92 4979.74,5302.97 4979.74,5440.47 5096.1,5556.83 H3.18@5181.1,5556.83
  Bottom Layer w6: v2(4397.6,4787.13) 4591.4,4787.13 v2(4611.1,4806.83)
HDMI_SDA: H3.15 U1.F14 | length 1381.6
  Top Layer w6: v2(4628.6,4904.33) 4711.1,4904.33 4767.01,4960.24 4767.01,5112.74 4963.83,5309.56 4963.83,5474.56 5096.1,5606.83 5231.1,5606.83 H3.15@5281.1,5656.83
  Bottom Layer w6: v2(4397.6,4905.23) 4627.7,4905.23 v2(4628.6,4904.33)
JOY1_DOWN_IO: H4.7 U1.T13 | length 1074.7
  Top Layer w6: U1.T13@4358.3,4511.53 4358.3,4462.37 4485.04,4335.63 4872.4,4335.63 4943.6,4406.83 5231.1,4406.83 H4.7@5281.1,4456.83
JOY1_LEFT_IO: H4.3 U1.T15 | length 994.5
  Top Layer w6: U1.T15@4437,4511.53 4437,4494.97 4517.64,4414.33 4838.6,4414.33 5031.1,4606.83 5231.1,4606.83 H4.3@5281.1,4656.83
JOY1_P6_IO: H4.9 U1.T12 | length 1114.7
  Top Layer w6: U1.T12@4318.9,4511.53 4318.9,4446.05 4468.6,4296.35 4888.67,4296.35 4899.16,4306.83 5231.1,4306.83 H4.9@5281.1,4356.83
JOY1_P7_IO: H4.5 U1.T14 | length 1034.7
  Top Layer w6: U1.T14@4397.6,4511.53 4397.6,4478.65 4501.32,4374.93 4854.92,4374.93 4986.82,4506.83 5231.1,4506.83 H4.5@5281.1,4556.83
JOY1_P8_IO: H4.14 U1.R10 | length 1168.2
  Top Layer w6: U1.R10@4240.2,4550.93 4260.1,4531.03 4260.1,4421.69 4444.37,4237.43 4780.5,4237.43 4861.1,4156.83 H4.14@5181.1,4156.83
JOY1_RIGHT_IO: H4.21 U1.N9 | length 1729.3
  Top Layer w6: v2(4221.1,4259.33) 4221.1,4189.33 4354.36,4056.07 4706.86,4056.07 5056.1,3706.83 5231.1,3706.83 H4.21@5281.1,3756.83
  Bottom Layer w6: v2(4200.8,4629.63) 4221.1,4609.33 v2(4221.1,4259.33)
JOY1_UP_IO: H4.10 U1.R12 | length 1022.1
  Top Layer w6: U1.R12@4318.9,4550.93 4337.1,4532.73 4337.1,4453.59 4473.86,4316.83 4880.19,4316.83 4920.19,4356.83 H4.10@5181.1,4356.83
JOY2_DOWN_IO: H4.24 U1.P9 | length 1606.1
  Top Layer w6: v2(4201.1,4236.83) 4201.1,4181.83 4346.31,4036.62 4698.81,4036.62 5078.6,3656.83 H4.24@5181.1,3656.83
  Bottom Layer w6: v2(4200.8,4590.33) 4201.1,4590.03 v2(4201.1,4236.83)
JOY2_LEFT_IO: H2.24 U1.N8 | length 1770.7
  Top Layer w6: H2.24@3081.1,3656.83 3131.1,3606.83 3269.45,3606.83 3718.68,4056.07 4007.84,4056.07 4141.1,4189.33 v2(4141.1,4259.33)
  Bottom Layer w6: v2(4141.1,4259.33) 4141.1,4609.33 v2(4161.4,4629.63)
JOY2_P6_IO: H2.25 U1.P8 | length 1647.5
  Top Layer w6: H2.25@3181.1,3556.83 3246.95,3556.83 3726.74,4036.62 4015.89,4036.62 4161.1,4181.83 v2(4161.1,4236.83)
  Bottom Layer w6: v2(4161.1,4236.83) 4161.1,4590.03 v2(4161.4,4590.33)
JOY2_P7_IO: H1.24 U1.M6 | length 1379.4
  Top Layer w6: H1.24@3081.1,5256.83 3131.1,5206.83 3266.1,5206.83 3323.6,5149.33 3323.6,5017.61 3356.1,4985.11 3356.1,4887.58 3521.86,4721.83 v2(3666.1,4721.83)
  Bottom Layer w6: v2(3666.1,4721.83) 3826.1,4721.83 3878.9,4669.03 v2(4082.7,4669.03)
JOY2_P8_IO: H1.23 U1.M7 | length 1331.4
  Top Layer w6: H1.23@3181.1,5256.83 3266.1,5256.83 3343.6,5179.33 3343.6,5025.9 3376.1,4993.4 3376.1,4895.87 3530.14,4741.83 v2(3638.6,4741.83)
  Bottom Layer w6: v2(3638.6,4741.83) 3834.81,4741.83 3887.31,4689.33 4101.7,4689.33 v2(4122,4669.03)
JOY2_RIGHT_IO: H2.23 U1.N6 | length 1608.6
  Top Layer w6: H2.23@3181.1,3656.83 3291.95,3656.83 3710.63,4075.51 3999.78,4075.51 4121.1,4196.83 v2(4121.1,4236.83)
  Bottom Layer w6: v2(4091.1,4629.33) 4102.1,4618.33 4102.1,4525.83 4121.1,4506.83 v2(4121.1,4236.83)
JOY2_UP_IO: H4.13 U1.T10 | length 1286.7
  Top Layer w6: U1.T10@4240.2,4511.53 4240.2,4413.45 4436.12,4217.53 4772.26,4217.53 4882.96,4106.83 5231.1,4106.83 H4.13@5281.1,4156.83
LED_O: H1.25 U1.M8 | length 1320.2
  Top Layer w6: H1.25@3181.1,5156.83 3266.1,5156.83 3303.6,5119.33 3303.6,5009.33 3336.1,4976.83 3336.1,4879.3 3513.57,4701.83 v2(3638.6,4701.83)
  Bottom Layer w6: v2(3638.6,4701.83) 3818.24,4701.83 3870.74,4649.33 4141.7,4649.33 v2(4161.4,4669.03)
MIC_O: H4.1 U1.P15 | length 1025.8
  Top Layer w6: U1.P15@4437,4590.33 4456.5,4570.83 4500.25,4570.83 4616.85,4454.23 4821.9,4454.23 5074.5,4706.83 5231.1,4706.83 H4.1@5281.1,4756.83
NCE: AS.6 R107.1 U1.J3 | length 3165.1
  Top Layer w10: AS.6@4656.1,6481.83 4706.1,6431.83 4788.6,6431.83 4806.1,6414.33 4806.1,6265.29 R107.1@4856.1,6215.29
  Inner2 w6: v2(3621.1,6071.83) 3621.1,6056.83 3627.1,6050.83 3627.1,5328.12 3666.4,5288.82 3666.4,4938.82 3818.09,4787.13 v2(3964.6,4787.13) ; v2(3951.1,6324.33) 4583.6,6324.33 4606.1,6346.83 4606.1,6411.83 4656.1,6461.83 AS.6@4656.1,6481.83
  Bottom Layer w6: v2(3621.1,6071.83) 3873.6,6324.33 v2(3951.1,6324.33)
NCONFIG: AS.5 R104.1 U1.H5 | length 2776.9
  Top Layer w10: R104.1@4656.1,6215.29 AS.5@4656.1,6381.83
  Inner2 w6: v2(4043.3,4826.53) 4003,4866.83 3851.1,4866.83 3746.1,4971.83 3746.1,5321.83 3706.8,5361.13 3706.8,6152.53 3856.1,6301.83 4596.1,6301.83 4656.1,6361.83 AS.5@4656.1,6381.83
NCS: AS.8 U1.D2 U12.7 | length 2591.8
  Inner2 w6: v2(3925.2,4984.03) 3907.4,5001.83 3828.6,5001.83 3766.1,5064.33 3766.1,5329.33 3726.8,5368.63 3726.8,6140.03 3866.1,6279.33 v2(4306.1,6279.33)
  Bottom Layer w6: v2(4306.1,6279.33) U12.7@4306.1,6353.85
  Bottom Layer w10: U12.7@4306.1,6353.85 4306.1,6441.83 4396.1,6531.83 4706.1,6531.83 AS.8@4756.1,6481.83
PS2_CLK_IO: H3.31 U1.N15 | length 1050.3
  Top Layer w6: U1.N15@4437,4629.63 4455.8,4610.83 4516.81,4610.83 4633.31,4494.33 4805.29,4494.33 5117.79,4806.83 5231.1,4806.83 H3.31@5281.1,4856.83
PS2_DATA_IO: H4.20 U1.N12 | length 1480.5
  Top Layer w6: v2(4281.1,4236.83) 4281.1,4211.83 4378.53,4114.4 4731.03,4114.4 4988.6,3856.83 H4.20@5181.1,3856.83
  Bottom Layer w6: v2(4281.1,4236.83) 4281.1,4501.83 4298.6,4519.33 4298.6,4609.33 v2(4318.9,4629.63)
PS2_MOUSE_CLK_IO: H3.23 U1.J15 | length 1271.6
  Top Layer w6: U1.J15@4437,4787.13 4458.3,4765.83 4581.02,4765.83 4697.62,4649.23 4741.12,4649.23 4929.9,4838.01 4929.9,5040.63 5096.1,5206.83 5231.1,5206.83 H3.23@5281.1,5256.83
PS2_MOUSE_DATA_IO: H3.24 U1.J16 | length 1126.2
  Top Layer w6: U1.J16@4476.4,4787.13 4589.84,4787.13 4706.44,4670.53 4732.3,4670.53 4908.6,4846.83 4908.6,5069.33 5096.1,5256.83 H3.24@5181.1,5256.83
SD_CS_N_O: H2.22 U1.P6 | length 1640.4
  Top Layer w6: H2.22@3081.1,3756.83 3131.1,3706.83 3314.45,3706.83 3702.57,4094.96 3991.73,4094.96 4101.1,4204.33 v2(4101.1,4259.33)
  Bottom Layer w6: v2(4082.7,4590.33) 4082.7,4522.73 4101.1,4504.33 v2(4101.1,4259.33)
SD_MISO_I: H1.30 U1.L1 | length 1027.6
  Top Layer w6: H1.30@3081.1,4956.83 3131.1,4906.83 3221.1,4906.83 3243.6,4884.33 3243.6,4835.53 3481,4598.13 3694.66,4598.13 3804.96,4708.43 U1.L1@3885.8,4708.43
SD_MOSI_O: H3.22 U1.L8 | length 1452.5
  Top Layer w6: v2(4691.1,4726.83) 4691.1,4769.33 4848.33,4926.56 4848.33,5081.56 5043.38,5276.61 5043.38,5304.11 5096.1,5356.83 H3.22@5181.1,5356.83
  Bottom Layer w6: v2(4161.4,4708.43) 4242,4708.43 4281.1,4669.33 4571.1,4669.33 4606.1,4704.33 4668.6,4704.33 v2(4691.1,4726.83)